# Altium PCB CP2102N_PCB.PcbDoc
Units mm, origin at the board's own origin, x right, y up, seen from the top; angles counter-clockwise.
Board outline 30 x 15 mm, 2 copper layers (Top Layer, Bottom Layer), stack 1.57 mm thick; 28 components, 18 nets, 90 pads, 164 vias.
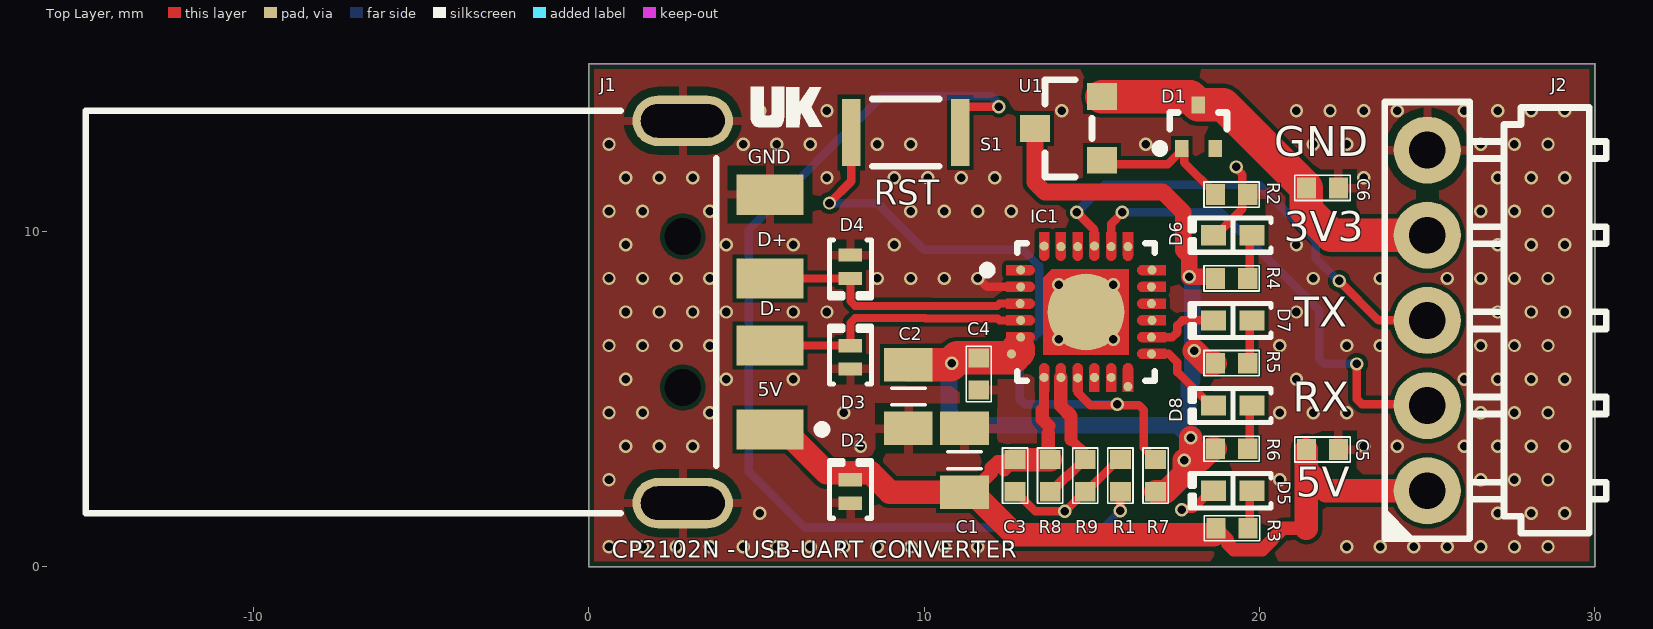
[diagram p0: Top Layer view]
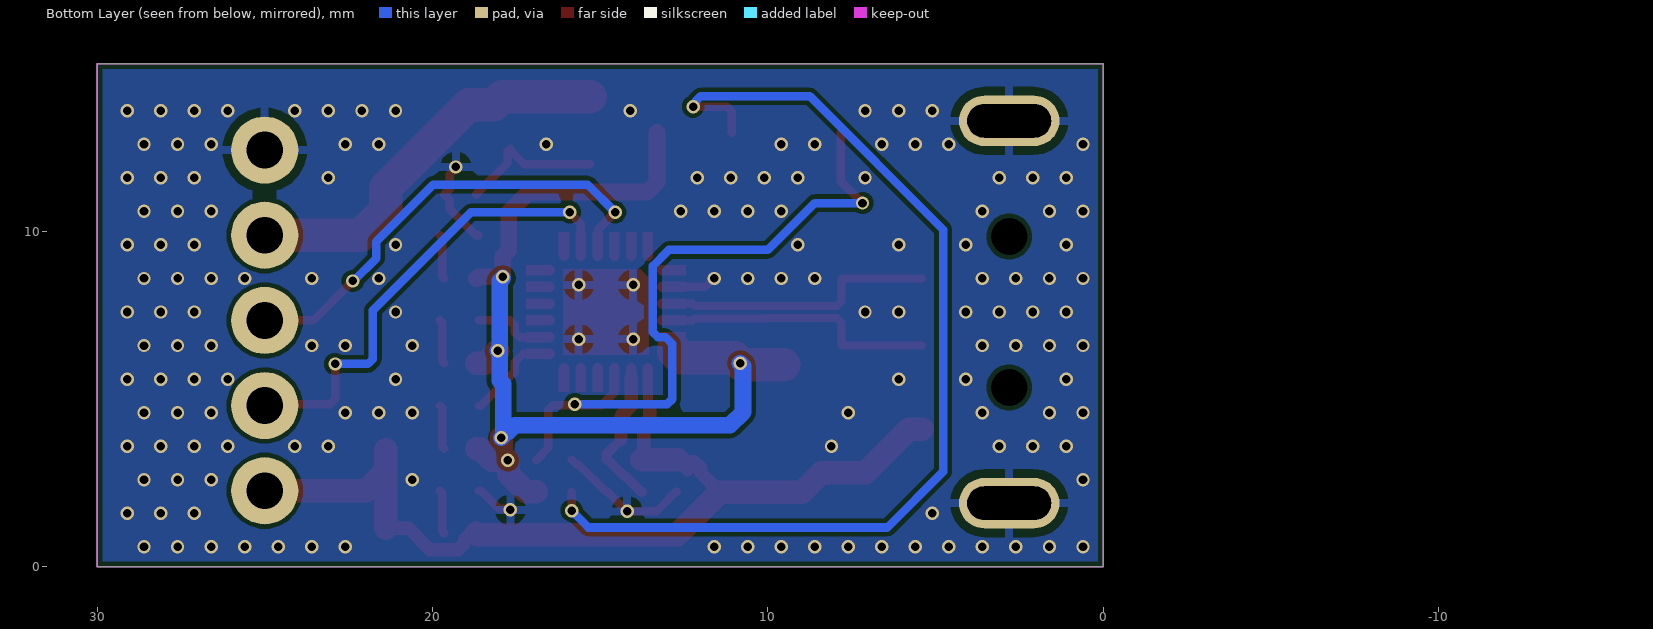
[diagram p1: Bottom Layer view, seen from below]

## Layer stack, top to bottom
Top Solder: solder mask 0.0102, Solder Resist, Dk 3.5
Top Layer: signal copper 0.0356
Dielectric 1: dielectric 1.4986, FR-4, Dk 4.8
Bottom Layer: signal copper 0.0356
Bottom Solder: solder mask 0.0102, Solder Resist, Dk 3.5

## Board outline
0,0 0,15 30,15 30,0

## Design rules (kind name [scope] priority, off if disabled: settings)
Clearance [All] p1: gap=0.127 ignorepadtopadclearanceinfootprint=TRUE
DiffPairsRouting [All] p1: maxlimit=0.127 minlimit=0.127 mostfreqgap=0.127 toplayer_minwidth=0.24 toplayer_maxwidth=0.24 toplayer_prefwidth=0.24 bottomlayer_minwidth=0.24 bottomlayer_maxwidth=0.24 bottomlayer_prefwidth=0.24 impedanceprofiledriven=TRUE impedanceprofileid={1EF061BC-6906-41B3-860A-3ED7095594BF} impedanceprofilevalue=90.000000 maxuncoupledlength=12.7
MinimumSolderMaskSliver [All] p1: minsoldermaskwidth=0.08
PolygonConnect [All] p1: connectstyle=Relief reliefconductorwidth=0.254 reliefentries=4 polygonreliefangle="90 Angle" airgapwidth=0.254
RoutingVias [All] p1: holewidth=0.4 width=0.7 viastyle="Through Hole" minholewidth=0.254 minwidth=0.4 maxholewidth=0.7 maxwidth=1
SilkToSilkClearance [All] p1: silktosilkclearance=0.025
SilkToSolderMaskClearance [IsPad] p1: minsilkscreentomaskgap=0.03 clearancetoexposedcopper=TRUE
SolderMaskExpansion [All] p1: expansion=0.102 istentingtop=FALSE
SupplyNets "Schematic Supply Nets_3" [InNet('VDD_OUT')] p1: voltage=0.000
SupplyNets "Schematic Supply Nets_2" [InNet('VDD')] p2: voltage=0.000
SupplyNets "Schematic Supply Nets_1" [InNet('GND')] p3: voltage=0.000
SupplyNets "Schematic Supply Nets" [InNet('VBUS')] p4: voltage=0.000
Width [All] p1: maxlimit=2 minlimit=0.254 preferedwidth=0.254 minimp=50.000000 maximp=50.000000 favimp=50.000000
26 further rules are at their usual default settings.

## Classes and differential pairs
differential pair USB: +USB_P -USB_N

## Components (designator, comment, footprint, x,y, rotation, side; value= is the part's Value field where it differs from the comment)
C1 "4u7" "CAP TANT 0805" 11.2,3.18 r90 top
C2 "4u7" "CAP TANT 0805" 9.525,5.08 r270 top
C3 "1u" "CAP CER 0402" 12.707,2.72 r90 top
C4 "1u" "CAP CER 0402" 11.625,5.75 r90 top
C5 "1u" "CAP CER 0402" 21.878,3.5 r180 top
C6 "1u" "CAP CER 0402" 21.878,11.3 r180 top
D1 "MMBZ5226BT-7-F" "DIODES SOT-523" 18.175,13.125 r90 top
D2 "UCLAMP5031PW.C" 0402 7.8,2.25 r90 top
D3 "UCLAMP5031PW.C" 0402 7.8,6.25 r90 top
D4 "UCLAMP5031PW.C" 0402 7.8,8.95 r270 top
D5 "Green" "LED 0402_1005 GREEN" 19.2,2.27 r180 top
D6 "Green" "LED 0402_1005 GREEN" 19.2,9.89 r180 top
D7 "Blue" "LED 0402_1005 BLUE" 19.2,7.35 r180 top
D8 "Red" "LED 0402_1005 RED" 19.2,4.81 r180 top
IC1 "BS250FTA" "DIODES SOT-23-3" 14.3,13.075 r180 top
J1 "480-37-1000" MOLX-480-37-1000_V 4.1,7.6 r270 top
J2 "M20-9960545" "HARWIN M20-9960545" 25,7.35 r90 top
R1 "100R" "Resistor 0402" 15.85,2.72 r270 top
R2 "10k" "Resistor 0402" 19.165,11.1 r180 top
R3 "470R" "Resistor 0402" 19.175,1.15 r180 top
R4 "470R" "Resistor 0402" 19.165,8.6 r180 top
R5 "470R" "Resistor 0402" 19.165,6.075 r180 top
R6 "470R" "Resistor 0402" 19.165,3.525 r180 top
R7 "1k" "Resistor 0402" 16.898,2.72 r90 top
R8 "22k1" "Resistor 0402" 13.755,2.72 r90 top
R9 "47k5" "Resistor 0402" 14.802,2.72 r90 top
S1 "EVP-AWCD2A" "PANASONIC EVPAW" 9.45,12.95 r0 top
U1 "CP2102N-A02-GQFN24" FP-CP2102N-A02-GQFN24-MFG 14.825,7.6 r0 top

## Footprints (in the part's own frame and the unit in brackets; to place one, negate y for a bottom-side part, rotate by r counter-clockwise, add the part's x,y. Pads: shape width x height; smd on the part's side, far side on the other; paste and mask are expansions set on the pad)
0402 [mm] "SODFL, 2-Leads, Body 0.675x1.075mm, IPC Medium Density"
  rect 0.4x0.7 smd: 1(-0.35,0) 2(0.35,0)
  silkscreen extent -0.8,-0.63 0.92,0.63, body extent -0.51,-0.31 0.5,0.3, height 0.45
"CAP CER 0402" [mm]
  rect 0.57x0.62 smd mask+0.05: 1(-0.48,0) 2(0.48,0)
  silkscreen extent -0.82,-0.38 0.82,0.38, body extent -0.5,-0.25 0.5,0.25, height 0.56
"CAP TANT 0805" [mm]
  rect 1x1.45 smd mask+0.05: 1(-0.95,0) 2(0.95,0)
  silkscreen extent -0.25,-0.5 0.25,0.5, body extent -1.02,-0.65 1.02,0.65, height 1.2
"DIODES SOT-23-3" [mm] "SOT23, 3-Leads, Body 2.90x2.40mm, Pitch 0.95mm, IPC Medium Density"
  rect 0.9x0.8 smd: 1(-1,0.95) 2(-1,-0.95) 3(1,0)
  silkscreen extent -0.7,-1.45 0.7,1.45, body extent -1.41,-1.45 1.41,1.45, height 1.5
"DIODES SOT-523" [mm] "SOT523, 3-Leads, Body 0.8x1.60mm, Pitch 0.50mm, IPC Medium Density"
  rect 0.51x0.4 smd: 1(-0.65,0.5) 2(0.65,0) 3(-0.65,-0.5)
  silkscreen extent -0.77,-0.85 0.42,1.27, body extent -0.81,-0.8 0.81,0.8, height 0.82
FP-CP2102N-A02-GQFN24-MFG [mm]
  round 0.27 smd paste+0 mask+0: 1(-1.95,1.25) 2(-1.95,0.75) 3(-1.965,0.25) 4(-1.95,-0.25) 5(-1.95,-0.75) 6(-2.225,-1.25) 7(-1.25,-1.95) 8(-0.75,-1.95) 9(-0.25,-1.965) 10(0.25,-1.95) 11(0.75,-1.95) 12(1.25,-2.225) 13(1.95,-1.25) 14(1.95,-0.75) 15(1.965,-0.25) 16(1.95,0.25) 17(1.95,0.75) 18(1.965,1.25) 19(1.25,1.95) 20(0.75,1.95) 21(0.25,1.965) 22(-0.25,1.95) 23(-0.75,1.95) 24(-1.25,1.965)
  round 2.295 smd paste+0 mask+0: 25(0,0)
  Top Layer region: -1.1,2.375 -1.1,1.675 -1.111,1.618 -1.144,1.569 -1.193,1.536 -1.25,1.525 -1.25,1.525 -1.307,1.536 -1.356,1.569 -1.389,1.618 -1.4,1.675 -1.4,1.675 -1.4,2.375
  Top Layer region: -0.6,2.375 -0.6,1.675 -0.611,1.618 -0.644,1.569 -0.693,1.536 -0.75,1.525 -0.75,1.525 -0.807,1.536 -0.856,1.569 -0.889,1.618 -0.9,1.675 -0.9,1.675 -0.9,2.375
  Top Layer region: -0.1,2.375 -0.1,1.675 -0.111,1.618 -0.144,1.569 -0.193,1.536 -0.25,1.525 -0.25,1.525 -0.307,1.536 -0.356,1.569 -0.389,1.618 -0.4,1.675 -0.4,1.675 -0.4,2.375
  Top Layer region: 0.4,2.375 0.4,1.675 0.389,1.618 0.356,1.569 0.307,1.536 0.25,1.525 0.25,1.525 0.193,1.536 0.144,1.569 0.111,1.618 0.1,1.675 0.1,1.675 0.1,2.375
  Top Layer region: 0.9,2.375 0.9,1.675 0.889,1.618 0.856,1.569 0.807,1.536 0.75,1.525 0.75,1.525 0.693,1.536 0.644,1.569 0.611,1.618 0.6,1.675 0.6,1.675 0.6,2.375
  Top Layer region: 1.4,2.375 1.4,1.675 1.389,1.618 1.356,1.569 1.307,1.536 1.25,1.525 1.25,1.525 1.193,1.536 1.144,1.569 1.111,1.618 1.1,1.675 1.1,1.675 1.1,2.375
  Top Layer region: 2.375,1.1 1.675,1.1 1.618,1.111 1.569,1.144 1.536,1.193 1.525,1.25 1.525,1.25 1.536,1.307 1.569,1.356 1.618,1.389 1.675,1.4 1.675,1.4 2.375,1.4
  Top Layer region: 2.375,0.6 1.675,0.6 1.618,0.611 1.569,0.644 1.536,0.693 1.525,0.75 1.525,0.75 1.536,0.807 1.569,0.856 1.618,0.889 1.675,0.9 1.675,0.9 2.375,0.9
  Top Layer region: 2.375,0.1 1.675,0.1 1.618,0.111 1.569,0.144 1.536,0.193 1.525,0.25 1.525,0.25 1.536,0.307 1.569,0.356 1.618,0.389 1.675,0.4 1.675,0.4 2.375,0.4
  Top Layer region: 2.375,-0.4 1.675,-0.4 1.618,-0.389 1.569,-0.356 1.536,-0.307 1.525,-0.25 1.525,-0.25 1.536,-0.193 1.569,-0.144 1.618,-0.111 1.675,-0.1 1.675,-0.1 2.375,-0.1
  Top Layer region: 2.375,-0.9 1.675,-0.9 1.618,-0.889 1.569,-0.856 1.536,-0.807 1.525,-0.75 1.525,-0.75 1.536,-0.693 1.569,-0.644 1.618,-0.611 1.675,-0.6 1.675,-0.6 2.375,-0.6
  Top Layer region: 2.375,-1.4 1.675,-1.4 1.618,-1.389 1.569,-1.356 1.536,-1.307 1.525,-1.25 1.525,-1.25 1.536,-1.193 1.569,-1.144 1.618,-1.111 1.675,-1.1 1.675,-1.1 2.375,-1.1
  Top Layer region: 1.1,-2.375 1.1,-1.675 1.111,-1.618 1.144,-1.569 1.193,-1.536 1.25,-1.525 1.25,-1.525 1.307,-1.536 1.356,-1.569 1.389,-1.618 1.4,-1.675 1.4,-1.675 1.4,-2.375
  Top Layer region: 0.6,-2.375 0.6,-1.675 0.611,-1.618 0.644,-1.569 0.693,-1.536 0.75,-1.525 0.75,-1.525 0.807,-1.536 0.856,-1.569 0.889,-1.618 0.9,-1.675 0.9,-1.675 0.9,-2.375
  Top Layer region: 0.1,-2.375 0.1,-1.675 0.111,-1.618 0.144,-1.569 0.193,-1.536 0.25,-1.525 0.25,-1.525 0.307,-1.536 0.356,-1.569 0.389,-1.618 0.4,-1.675 0.4,-1.675 0.4,-2.375
  Top Layer region: -0.4,-2.375 -0.4,-1.675 -0.389,-1.618 -0.356,-1.569 -0.307,-1.536 -0.25,-1.525 -0.25,-1.525 -0.193,-1.536 -0.144,-1.569 -0.111,-1.618 -0.1,-1.675 -0.1,-1.675 -0.1,-2.375
  Top Layer region: -0.9,-2.375 -0.9,-1.675 -0.889,-1.618 -0.856,-1.569 -0.807,-1.536 -0.75,-1.525 -0.75,-1.525 -0.693,-1.536 -0.644,-1.569 -0.611,-1.618 -0.6,-1.675 -0.6,-1.675 -0.6,-2.375
  Top Layer region: -1.4,-2.375 -1.4,-1.675 -1.389,-1.618 -1.356,-1.569 -1.307,-1.536 -1.25,-1.525 -1.25,-1.525 -1.193,-1.536 -1.144,-1.569 -1.111,-1.618 -1.1,-1.675 -1.1,-1.675 -1.1,-2.375
  Top Layer region: -2.375,-1.1 -1.675,-1.1 -1.618,-1.111 -1.569,-1.144 -1.536,-1.193 -1.525,-1.25 -1.525,-1.25 -1.536,-1.307 -1.569,-1.356 -1.618,-1.389 -1.675,-1.4 -1.675,-1.4 -2.375,-1.4
  Top Layer region: -2.375,-0.6 -1.675,-0.6 -1.618,-0.611 -1.569,-0.644 -1.536,-0.693 -1.525,-0.75 -1.525,-0.75 -1.536,-0.807 -1.569,-0.856 -1.618,-0.889 -1.675,-0.9 -1.675,-0.9 -2.375,-0.9
  Top Layer region: -2.375,-0.1 -1.675,-0.1 -1.618,-0.111 -1.569,-0.144 -1.536,-0.193 -1.525,-0.25 -1.525,-0.25 -1.536,-0.307 -1.569,-0.356 -1.618,-0.389 -1.675,-0.4 -1.675,-0.4 -2.375,-0.4
  Top Layer region: -2.375,0.4 -1.675,0.4 -1.618,0.389 -1.569,0.356 -1.536,0.307 -1.525,0.25 -1.525,0.25 -1.536,0.193 -1.569,0.144 -1.618,0.111 -1.675,0.1 -1.675,0.1 -2.375,0.1
  Top Layer region: -2.375,0.9 -1.675,0.9 -1.618,0.889 -1.569,0.856 -1.536,0.807 -1.525,0.75 -1.525,0.75 -1.536,0.693 -1.569,0.644 -1.618,0.611 -1.675,0.6 -1.675,0.6 -2.375,0.6
  Top Layer region: -2.375,1.4 -1.675,1.4 -1.618,1.389 -1.569,1.356 -1.536,1.307 -1.525,1.25 -1.525,1.25 -1.536,1.193 -1.569,1.144 -1.618,1.111 -1.675,1.1 -1.675,1.1 -2.375,1.1
  Top Layer region: -1.275,-1.275 -1.275,1.025 -1.025,1.275 1.275,1.275 1.275,-1.275 -1.275,-1.275
  silkscreen extent -3.07,-2.05 2.05,2.05, body extent -2.48,-2.48 2.48,2.48, height 0.25
"HARWIN M20-9960545" [mm] "2.54mm DIL PC TAIL PIN HEADER ASSEMBLY"
  round 2 hole 1.1: 1(-5.08,0) 2(-2.54,0) 3(0,0) 4(2.54,0) 5(5.08,0)
  silkscreen extent -6.51,-5.33 6.51,1.3, body extent -6.35,-10.9 6.35,0.32, height 2.54
"LED 0402_1005 BLUE" [mm] "Chip Diode, 2-Leads, Body 1.00x0.50mm, IPC Medium Density"
  rect 0.75x0.6 smd: 1(-0.575,0) 2(0.575,0)
  silkscreen extent -1.14,-0.51 1.27,0.51, body extent -0.5,-0.25 0.5,0.25, height 0.21
"LED 0402_1005 GREEN" [mm] "Chip Diode, 2-Leads, Body 1.00x0.50mm, IPC Medium Density"
  rect 0.75x0.6 smd: 1(-0.575,0) 2(0.575,0)
  silkscreen extent -1.14,-0.51 1.27,0.51, body extent -0.5,-0.25 0.5,0.25, height 0.21
"LED 0402_1005 RED" [mm] "Chip Diode, 2-Leads, Body 1.00x0.50mm, IPC Medium Density"
  rect 0.75x0.6 smd: 1(-0.575,0) 2(0.575,0)
  silkscreen extent -1.14,-0.51 1.27,0.51, body extent -0.5,-0.25 0.5,0.25, height 0.21
MOLX-480-37-1000_V [mm] "CONN, 4-Leads, Body 12x18.8mm"
  rect 1.2x2 smd: 1(3.5,1.3) 2(1,1.3) 3(-1,1.3) 4(-3.5,1.3)
  oval 1.5x3 hole 1 slot 2.5 at 90 deg: 5(-5.7,-1.3) 6(5.7,-1.3)
  round 0.5 hole 1.1 unplated: MH1(-2.25,-1.3) MH2(2.25,-1.3)
  silkscreen extent -6,-19.1 6,2.98, body extent -6.35,-19.08 6.35,2.2, height 3.07
"PANASONIC EVPAW" [mm]
  rect 0.55x2 smd: 1(-1.625,0) 2(1.625,0)
  silkscreen extent -1,-1 1,1, body extent -1.75,-1 1.75,1, height 0.58
"Resistor 0402" [mm]
  rect 0.57x0.62 smd mask+0.05: 1(-0.48,0) 2(0.48,0)
  silkscreen extent -0.82,-0.38 0.82,0.38, body extent -0.5,-0.25 0.5,0.25, height 0.36

## Part data
C1 C2: library part "CAP TANT GENERIC 0805", Designed by=UK
C3 C4 C5 C6: library part "CAP CER GENERIC 0402", Designed by=UK
D1: "DIODE ZENER 3.3V 150MW SOT523", Current - Reverse Leakage @ Vr="25 µA @ 1 V", Manufacturer="Diodes Incorporated", Operating Temperature="-65°C ~ 150°C", Package / Case=SOT-523, Power - Max="150 mW", Supplier Part Number 1=MMBZ5226BTDICT-ND, Tolerance=±5%, Voltage - Forward (Vf) (Max) @ If="900 mV @ 10 mA", Voltage - Zener (Nom) (Vz)="3.3 V", ComponentLink1Description=Datasheet, ComponentLink1URL=https://www.diodes.com/assets/Datasheets/ds30267.pdf, ComponentLink2Description="DigiKey Link", ComponentLink2URL=https://www.digikey.com/en/products/detail/diodes-incorporated/MMBZ5226BT-7-F/2095654, Impedance (Max) (Zzt)="28 Ohms", LastUpdated="6/3/2024 8:01:51 PM", Lifecycle Status=Active, Minimum Order=1, Mounting Type="Surface Mount", Packaging=TapeAndReel, Part Number=MMBZ5226BT-7-F, Part Status=Active, PartId=790, Price=0.05, Series=-, Supplier 1=DigiKey, Supplier Device Package=SOT-523
D2 D3 D4: "5V ESD & EOS PROTECTION", Device Package="0402 (1005 Metric)", Manufacturer="Semtech Corporation", Power Line Protection=No, Supplier Device Package="2-DFN (1x0.6)", Supplier Part Number 1=600-UCLAMP5031PW.CCT-ND, Voltage - Reverse Standoff (Typ)=5V, Applications="General Purpose", ComponentLink2Description="DigiKey Link", ComponentLink2URL=https://www.digikey.com/en/products/detail/semtech-corporation/UCLAMP5031PW-C/21371847, LastUpdated="6/3/2024 8:22:49 PM", Lifecycle Status=Active, Minimum Order=1, Mounting Type="Surface Mount", Package / Case="0402 (1005 Metric)", Packaging=TapeAndReel, Part Number=UCLAMP5031PW.C, PartId=11945, Price=0.08, Series=uClamp®, Supplier 1=DigiKey, Type=Zener, Unidirectional Channels=1
D5 D6: library part QBLP595-AG15, "LED GREEN CLEAR 0402 SMD", Current - Test=5mA, Device Package="0402 (1005 Metric)", Lens Color=Colorless, Manufacturer="QT Brightek (QTB)", Millicandela Rating=9.5mcd, Supplier Device Package=0402, Supplier Part Number 1=1516-QBLP595-AG15CT-ND, Voltage - Forward (Vf) (Typ)=1.9V, Color=Green, ComponentLink1Description=Datasheet, ComponentLink1URL=https://www.qt-brightek.com/datasheet/QBLP595-AG15.pdf, ComponentLink2Description="DigiKey Link", ComponentLink2URL=https://www.digikey.com/en/products/detail/qt-brightek-qtb/QBLP595-AG15/17048989, Configuration=Standard, Height (Max)=0.60mm, LastUpdated="6/3/2024 7:58:13 PM", Lens Size="0.70mm x 0.50mm", Lens Style="Rectangle with Flat Top", Lens Transparency=Clear, Lifecycle Status=Active, Minimum Order=1, Mounting Type="Surface Mount", Package / Case="0402 (1005 Metric)", Packaging=TapeAndReel, Part Number=QBLP595-AG15, Part Status=Active, PartId=1263, Price=0.05, Series=QBLP595, Size / Dimension="1.00mm L x 0.50mm W", Supplier 1=DigiKey, Viewing Angle=140°, Wavelength - Dominant=570nm
D7: library part QBLP595-IB5, "LED BLUE CLEAR 0402 SMD", Current - Test=5mA, Device Package="0402 (1005 Metric)", Lens Color=Colorless, Manufacturer="QT Brightek (QTB)", Millicandela Rating=38mcd, Supplier Device Package=0402, Supplier Part Number 1=1516-QBLP595-IB5CT-ND, Voltage - Forward (Vf) (Typ)=2.7V, Color=Blue, ComponentLink1Description=Datasheet, ComponentLink1URL=https://www.qt-brightek.com/datasheet/QBLP595-IB5.pdf, ComponentLink2Description="DigiKey Link", ComponentLink2URL=https://www.digikey.com/en/products/detail/qt-brightek-qtb/QBLP595-IB5/17049838, Configuration=Standard, Height (Max)=0.60mm, LastUpdated="6/3/2024 7:57:31 PM", Lens Size="0.70mm x 0.50mm", Lens Style="Rectangle with Flat Top", Lens Transparency=Clear, Lifecycle Status=Active, Minimum Order=1, Mounting Type="Surface Mount", Package / Case="0402 (1005 Metric)", Packaging=TapeAndReel, Part Number=QBLP595-IB5, Part Status=Active, PartId=1260, Price=0.05, Series=QBLP595, Size / Dimension="1.00mm L x 0.50mm W", Supplier 1=DigiKey, Viewing Angle=140°, Wavelength - Dominant=470nm
D8: library part QBLP595-R5-2897, "LED RED CLEAR 0402 SMD", Current - Test=5mA, Device Package="0402 (1005 Metric)", Lens Color=Colorless, Manufacturer="QT Brightek (QTB)", Millicandela Rating=95mcd, Supplier Device Package=0402, Supplier Part Number 1=1516-QBLP595-R5-2897CT-ND, Voltage - Forward (Vf) (Typ)=1.85V, Color=Red, ComponentLink1Description=Datasheet, ComponentLink1URL=https://www.qt-brightek.com/datasheet/QBLP595-R5-2897.pdf, ComponentLink2Description="DigiKey Link", ComponentLink2URL=https://www.digikey.com/en/products/detail/qt-brightek-qtb/QBLP595-R5-2897/17048972, Configuration=Standard, Height (Max)=0.60mm, LastUpdated="6/3/2024 7:59:16 PM", Lens Size="0.70mm x 0.50mm", Lens Style="Rectangle with Flat Top", Lens Transparency=Clear, Lifecycle Status=Active, Minimum Order=1, Mounting Type="Surface Mount", Package / Case="0402 (1005 Metric)", Packaging=TapeAndReel, Part Number=QBLP595-R5-2897, Part Status=Active, PartId=1266, Price=0.05, Series=QBLP595, Size / Dimension="1.00mm L x 0.50mm W", Supplier 1=DigiKey, Viewing Angle=140°, Wavelength - Dominant=622nm
IC1: "MOSFET P-CH 45V 90MA SOT23-3", Current - Continuous Drain (Id) @ 25°C="90mA (Ta)", Drain to Source Voltage (Vdss)="45 V", Drive Voltage (Max Rds On,  Min Rds On)=10V, Input Capacitance (Ciss) (Max) @ Vds="25 pF @ 10 V", Manufacturer="Diodes Incorporated", Operating Temperature="-55°C ~ 150°C (TJ)", Package / Case="TO-236-3, SC-59, SOT-23-3", Power Dissipation (Max)="330mW (Ta)", Supplier Device Package=SOT-23-3, Supplier Part Number 1=BS250FCT-ND, ComponentLink1Description=Datasheet, ComponentLink1URL=https://www.diodes.com/assets/Datasheets/BS250F.pdf, ComponentLink2Description="DigiKey Link", ComponentLink2URL=https://www.digikey.com/en/products/detail/diodes-incorporated/BS250FTA/58819, FET Type=P-Channel, LastUpdated="6/3/2024 8:15:20 PM", Lifecycle Status=Active, Minimum Order=1, Mounting Type="Surface Mount", Packaging=TapeAndReel, Part Number=BS250FTA, Part Status=Active, Price=0.22, Rds On (Max) @ Id, Vgs="14Ohm @ 200mA, 10V", Series=-, Supplier 1=DigiKey, Technology="MOSFET (Metal Oxide)", Vgs (Max)=±20V, Vgs(th) (Max) @ Id="3.5V @ 1mA"
J1: library part CMP-1676-00005-2, "Universal Serial Bus (USB) Shielded I/O Plug, Type A, Right Angle Connector, 1.5 A, -20 to 85 degC, 4-Pin SMD, RoHS, Tray", Case Code (Imperial)=0603, Case Code (Metric)=1608, Max Operating Temperature="155 degC", Min Operating Temperature="-55 degC", Package Quantity=5000, Power Rating="100 mW", Resistance="1 mohm", Tolerance=1%, Voltage Rating="50 V", Case\Package=0603, ComponentLink1Description="Manufacturer URL", ComponentLink1URL=http://www.molex.com/, ComponentLink2Description=Datasheet, ComponentLink2URL=http://www.molex.com/pdm_docs/sd/480371000_sd.pdf, DatasheetVersion="Rev. D, 06/2004", Height="0.45 mm", Length="1.6 mm", Mount="Surface Mount", PackageDescription="4-Pin Surface Mount Device, Body 12 x 18.8 mm", PackageReference=480-37-1000, Packaging="Tape and Reel", Pins=2, REACH SVHC="No SVHC", RoHSCompliant=true, Voltage Rating (DC)="50 V", Width="0.8 mm"
J2: "CONN HEADER R/A 5POS 2.54MM", Current Rating (Amps)="3A per Contact", Insulation Color=Black, Manufacturer="Harwin Inc.", Material Flammability Rating="UL94 V-0", Operating Temperature="-40°C ~ 105°C", Supplier Part Number 1=952-2246-ND, ComponentLink1Description=Datasheet, ComponentLink1URL=https://cdn.harwin.com/pdfs/Harwin_PC_Connectors_M20.pdf, ComponentLink2Description="DigiKey Link", ComponentLink2URL=https://www.digikey.com/en/products/detail/harwin-inc/M20-9960545/3728210, Connector Type="Header, Cuttable", Contact Finish - Mating=Gold, Contact Length - Mating="0.240\" (6.10mm)", Contact Length - Post="0.118\" (3.00mm)", Contact Material=Brass, Contact Shape=Square, Contact Type="Male Pin", Fastening Type=Push-Pull, Insulation Height="0.100\" (2.54mm)", Insulation Material="Polyamide (PA6T), Nylon 6T", LastUpdated="9/21/2022 7:23:36 PM", Lifecycle Status=Active, Minimum Order=1, Mounting Type="Through Hole, Right Angle", Number of Positions=5, Number of Positions Loaded=All, Number of Rows=1, Packaging=Bulk, Part Number=M20-9960545, Part Status=Active, PartId=168, Pitch - Mating="0.100\" (2.54mm)", Price=0.14, Row Spacing - Mating="-40°C ~ 105°C", Series=M20, Shrouding=Unshrouded, Style="Board to Board or Cable", Supplier 1=DigiKey, Termination=Solder
R1 R2 R3 R4 R5 R6 R7 R8 R9: library part "RES 0402", "SMD Chip Resistor, 0402 [1005 Metric], Thick Film, General Purpose", Designed by=UK
S1: "SWITCH TACTILE SPST-NO 0.02A 15V", Contact Rating @ Voltage="0.02A @ 15VDC", Manufacturer="Panasonic Electronic Components", Operating Force=240gf, Operating Temperature="-40°C ~ 85°C", Supplier Part Number 1=P19744CT-ND, Actuator Height off PCB, Vertical=0.60mm, Actuator Orientation="Top Actuated", Actuator Type=Standard, Circuit=SPST-NO, ComponentLink1Description=Datasheet, ComponentLink1URL=//media.digikey.com/pdf/Data%20Sheets/Panasonic%20Electronic%20Components/EVPAW.pdf, ComponentLink2Description="DigiKey Link", ComponentLink2URL=https://www.digikey.com/en/products/detail/panasonic-electronic-components/EVP-AWCD2A/6125103, Illumination=Non-Illuminated, Ingress Protection="IP67 - Dust Tight, Waterproof", LastUpdated="6/3/2024 8:19:31 PM", Lifecycle Status=Active, Minimum Order=1, Mounting Type="Surface Mount", Outline="3.00mm x 2.00mm", Packaging=TapeAndReel, Part Number=EVP-AWCD2A, Part Status=Active, Price=0.30, Series=EVPAW, Supplier 1=DigiKey, Switch Function=Off-Mom, Termination Style="SMD (SMT) Tab"
U1: library part CMP-08107-000010-1, "IC USB TO UART BRIDGE QFN24"

## Via types
v1: diameter 0.4, hole 0.254, Top Layer to Bottom Layer, tented both sides, 164 vias

## Nets (pads, with @x,y where several pads share a name; then routed paths per layer and width w, separated by ;. In a path a pad name is that pad's centre, name@x,y a point inside that pad or via, vN(x,y) a via of type N, cw(c..) or ccw(c..) an arc to the next point about the centre after c; other vN are vias at no path point)
CP_RST: R7.2 S1.1 U1.9 | length 21
  Top Layer w0.254: v1(7.175,10.85) 7.825,11.5 S1.1 ; U1.9 14.578,5.631 14.578,5.197 14.95,4.825 15.723,4.825 v1(15.75,4.852) ; v1@15.75,4.825 16.401,4.825 16.55,4.676 16.55,3.548 16.715,3.383 16.715,3.358 16.873,3.2 R7.2
  Bottom Layer w0.254: v1(7.175,10.85) 8.6,10.85 10,9.45 12.95,9.45 13.425,8.975 13.425,6.999 13.276,6.85 13.05,6.85 12.85,6.65 12.85,5.001 12.999,4.852 v1(15.75,4.852)
CP_RXD: J2.2 U1.20 | length 14.1
  Top Layer w0.254: U1.20 15.575,10.226 15.9,10.551 v1(15.9,10.575) ; v1(22.9,6.05) 22.9,5 23.053,4.847 24.963,4.847 J2.2
  Bottom Layer w0.254: v1(15.9,10.575) 18.85,10.575 21.775,7.65 21.775,6.199 21.924,6.05 v1(22.9,6.05)
CP_TXD: J2.3 U1.21 | length 13.9
  Top Layer w0.254: v1(14.55,10.575) 15.072,10.053 15.072,9.569 U1.21 ; v1(22.375,8.525) 23.55,7.35 J2.3
  Bottom Layer w0.254: v1(14.55,10.575) 15.375,11.4 19.975,11.4 21.675,9.7 21.675,9.2 v1@22.325,8.55
CP_VUSB: R8.1 R9.2 U1.8 | length 4.2
  Top Layer w0.3: R8.1 13.779,2.24 14.23,2.69 14.255,2.69 14.367,2.802 14.379,2.802 14.777,3.2 R9.2 14.802,3.373 14.375,3.8
  Top Layer w0.4: U1.8 14.075,4.8 14.375,4.5 14.375,3.8
GND: C1.2 C2.2 C3.1 C4.1 C5.1 C6.1 D2.1 D3.1 D4.1 D5.2 D6.2 J1.4 J1.5 J1.6 J2.5 R1.1 R2.1 R9.1 U1.2 U1.25 | length 9.2
  Top Layer w0.254: v1(11.6,8.6) 11.625,8.6 11.875,8.35 U1.2 ; C3.1 12.732,2.24 13.316,1.656 14.192,1.656 v1(14.194,1.655) ; v1@14.193,1.656 14.777,2.24 14.827,2.24 15.629,3.042 15.692,3.042 R1.1 ; v1(17.675,1.7) 17.703,1.728 18.008,1.728 18.55,2.27 D5.2 ; D6.2 18.7,9.89 19.487,10.677 19.487,10.942 R2.1 19.487,11.258 19.487,11.698 19.3,11.885 v1(19.3,11.925)
  other v1: 0.6,0.6 1.6,0.6 2.6,0.6 3.6,0.6 4.6,0.6 5.6,0.6 6.6,0.6 7.6,0.6 8.6,0.6 9.6,0.6 10.6,0.6 11.6,0.6 22.6,0.6 23.6,0.6 24.6,0.6 25.6,0.6 26.6,0.6 27.6,0.6 28.6,0.6 5.1,1.6 27.1,1.6 28.1,1.6 29.1,1.6 0.6,2.6 20.6,2.6 26.6,2.6 27.6,2.6 28.6,2.6 1.1,3.6 2.1,3.6 3.1,3.6 8.1,3.6 23.1,3.6 24.1,3.6 26.1,3.6 27.1,3.6 28.1,3.6 29.1,3.6 0.6,4.6 1.6,4.6 3.6,4.6 7.6,4.6 20.6,4.6 21.6,4.6 22.6,4.6 26.6,4.6 27.6,4.6 28.6,4.6 1.1,5.6 4.1,5.6 6.1,5.6 21.1,5.6 26.1,5.6 27.1,5.6 28.1,5.6 29.1,5.6 0.6,6.6 1.6,6.6 2.6,6.6 3.6,6.6 20.6,6.6 22.6,6.6 23.6,6.6 26.6,6.6 27.6,6.6 28.6,6.6 14.014,6.789 15.636,6.789 1.1,7.6 2.1,7.6 3.1,7.6 4.1,7.6 6.1,7.6 7.1,7.6 21.1,7.6 27.1,7.6 28.1,7.6 29.1,7.6 14.014,8.411 15.636,8.411 0.6,8.6 1.6,8.6 2.6,8.6 3.6,8.6 8.6,8.6 9.6,8.6 10.6,8.6 21.6,8.6 23.6,8.6 25.6,8.6 26.6,8.6 27.6,8.6 28.6,8.6 1.1,9.6 4.1,9.6 6.1,9.6 9.1,9.6 21.1,9.6 27.1,9.6 28.1,9.6 29.1,9.6 0.6,10.6 1.6,10.6 3.6,10.6 9.6,10.6 10.6,10.6 11.6,10.6 12.6,10.6 26.6,10.6 27.6,10.6 28.6,10.6 1.1,11.6 2.1,11.6 3.1,11.6 7.1,11.6 9.1,11.6 10.1,11.6 11.1,11.6 12.1,11.6 23.1,11.6 27.1,11.6 28.1,11.6 29.1,11.6 0.6,12.6 4.6,12.6 5.6,12.6 6.6,12.6 8.6,12.6 9.6,12.6 16.6,12.6 21.6,12.6 22.6,12.6 26.6,12.6 27.6,12.6 28.6,12.6 5.1,13.6 6.1,13.6 7.1,13.6 14.1,13.6 21.1,13.6 22.1,13.6 23.1,13.6 24.1,13.6 26.1,13.6 27.1,13.6 28.1,13.6 29.1,13.6
LED_RXT: D8.2 U1.13 | length 2.7
  Top Layer w0.254: U1.13 17.297,6.35 17.55,6.097 17.55,5.81 18.55,4.81 D8.2
LED_TXT: D7.2 U1.14 | length 2.2
  Top Layer w0.254: U1.14 17.401,6.85 17.55,6.999 17.55,7.201 17.699,7.35 D7.2
NetD1_1: D1.1 IC1.1 R2.2 | length 4.4
  Top Layer w0.254: IC1.1@15.3,12 17.255,12 17.675,12.42 D1.1 17.748,12.402 17.748,12.062 18.685,11.125 R2.2
NetD5_1: D5.1 R3.1 | length 1.3
  Top Layer w0.254: R3.1@19.645,1 19.71,1.065 19.71,2.205 D5.1
NetD6_1: D6.1 R4.1 | length 1.3
  Top Layer w0.254: R4.1 19.71,8.665 19.71,9.825 D6.1
NetD7_1: D7.1 R5.1 | length 1.3
  Top Layer w0.254: R5.1 19.71,6.14 19.71,7.285 D7.1
NetD8_1: D8.1 R6.1 | length 1.3
  Top Layer w0.254: R6.1 19.71,3.59 19.71,4.745 D8.1
NetR1_2: R1.2 S1.2 | length 30.9
  Top Layer w0.254: S1.2 11.075,13.577 11.223,13.725 v1(12.225,13.725) ; v1(15.85,1.677) R1.2
  Bottom Layer w0.254: v1(12.225,13.725) 12.225,13.765 12.152,13.838 12.152,13.886 12.003,14.035 8.745,14.035 4.77,10.06 4.77,2.835 6.431,1.174 15.347,1.174 v1(15.85,1.677)
USB_N: D3.2 J1.2 U1.4 | length 8.2
  Top Layer w0.24: J1.2 D3.2 7.8,7.276 7.94,7.417 10.029,7.417 10.037,7.409 12.192,7.409 12.251,7.35 U1.4
USB_P: D4.2 J1.3 U1.3 | length 8.2
  Top Layer w0.24: J1.3 D4.2 7.8,7.924 7.94,7.783 10.181,7.783 10.189,7.776 12.177,7.776 12.251,7.85 U1.3
VBUS: C1.1 C3.2 C5.2 D2.2 J1.1 J2.1 R3.2 R8.2 U1.7 | length 29.3
  Top Layer w0.3: 13.525,4.675 13.575,4.725 U1.7
  Top Layer w0.4: C1.1@11.425,2.23 12,2.805 12,2.95 12.187,3.137 C3.2@12.404,3.137 ; 12.384,2.902 C3.2@12.682,3.2 ; 13.525,4.675 13.525,4.4 13.715,4.21 ; R8.2@13.695,3.235 13.695,3.975 ; R3.2@18.697,1.123 18.78,1.04 18.809,1.04 19.043,0.806 19.043,0.705 19.235,0.513 20.075,0.513 20.71,1.148 21.398,1.148
  Top Layer w0.7: J1.1 5.8,4.1 7.1,2.8 7.8,2.8 8.405,2.8 8.975,2.23 11.425,2.23 12.704,0.951 18.636,0.951 R3.2@18.685,1 ; C3.2@12.682,3.2 C3.2 R8.2@13.73,3.2 ; R8.2@13.695,3.235 R8.2@13.73,3.2 ; R8.2 R8.2@13.73,3.2 ; 21.398,1.148 21.398,2.856 ; C5.2 21.398,2.856 ; J2.1 21.984,2.27 21.398,2.856
VDD: C2.1 C4.2 IC1.3 R4.2 R5.2 R6.2 R7.1 U1.5 U1.6 | length 30.1
  Top Layer w0.5: IC1.3@13.3,12.95 13.3,11.468 13.593,11.175 17.115,11.175 17.725,10.565 17.725,9.44 17.9,9.265 v1(17.9,8.65) 18.635,8.65 R4.2
  Top Layer w0.7: R7.1 17.207,2.24 17.73,2.762 ; v1@17.75,2.997 v1(17.75,3.175) 18.232,3.175 18.582,3.525 R6.2 ; 17.95,3.3 v1(17.95,3.85) ; v1(18.05,6.45) 18.425,6.075 R5.2
  Top Layer w1: C2.1 10.78,6.03 10.98,6.23 12.615,6.23 12.8,6.415 12.8,6.5
  Bottom Layer w0.5: v1(10.825,6.075) 10.74,5.99 10.74,4.61 11.125,4.225 17.54,4.225 17.727,4.037 17.89,4.2 ; v1@17.9,8.615 17.99,8.525 17.99,6.51 v1(18.05,6.45) 17.99,6.39 17.99,5.55 17.89,5.45 17.89,4.2 ; v1(17.95,3.85) 17.89,3.91 17.89,4.2
VDD_OUT: C6.2 D1.2 IC1.2 J2.4 | length 11.8
  Top Layer w1: IC1.2 17.925,14.025 D1.2 18.923,13.775 C6.2 21.398,10.636 22.144,9.89 J2.4
pads on no net: D1.3 J1.MH1 J1.MH2 U1.1 U1.10 U1.11 U1.12 U1.15 U1.16 U1.17 U1.18 U1.19 U1.22 U1.23 U1.24

## Polygon pours and split planes (outlines as drawn)
GND on Bottom Layer "GND_L02_P000" (solid, remove dead copper, pour order 0): 0,15 30,15 30,0 0,0
GND on Top Layer "GND_L01_P001" (solid, remove dead copper, pour order 1): 0,15 30,15 30,0 0,0

## Keep-outs
Keep-Out Layer:
  the board outline again, w0.05

## Silkscreen, mask and mechanical layers (free items; w line width, h text height)
Top Overlay:
  region: 4.822,14.296 4.822,14.273 4.822,13.388 ccw(c5.096,13.388) 4.902,13.195 4.936,13.161 ccw(c5.045,13.271) 5.045,13.116 5.662,13.116 ccw(c5.662,13.225) 5.758,13.173 ccw(c5.306,13.419) 5.821,13.419 5.821,14.309 5.458,14.309 5.458,13.706 5.458,13.524 cw(c5.39,13.524) 5.39,13.456 5.276,13.456 cw(c5.276,13.524) 5.208,13.524 5.208,14.309 4.822,14.309
  region: 5.892,14.309 5.892,13.116 6.27,13.116 6.311,13.565 6.576,13.126 6.954,13.126 6.637,13.708 6.933,14.309 6.589,14.309 6.28,13.841 6.27,14.309
  text "GND" at 20.437,11.942 h1.52
  text "GND" at 4.735,11.884 h0.7
  text "RST" at 8.5,10.54 h1.27
  text "D+" at 5.027,9.425 h0.7
  text "3V3" at 20.725,9.408 h1.52
  text "D-" at 5.095,7.375 h0.7
  text "TX" at 21.028,6.862 h1.52
  text "5V" at 5.031,4.959 h0.7
  text "RX" at 20.989,4.322 h1.52
  text "5V" at 21.078,1.79 h1.52
  text "CP2102N - USB-UART CONVERTER" at 0.679,0.273 h0.51

## Text inside footprints (layer, text, board x,y; h text height)
J1: Mechanical 1 "PCB EDGE" at 0.26,6.33 h0.38 r270